# Altium PCB PCB1.PcbDoc
Units mil, origin at the board's own origin, x right, y up, seen from the top; angles counter-clockwise.
Board outline 7874.02 x 2795.28 mil, 2 copper layers (Top Layer, Bottom Layer); 61 components, 60 nets, 228 pads, 10 vias.
Unrouted connection lines stored in the file: 50.
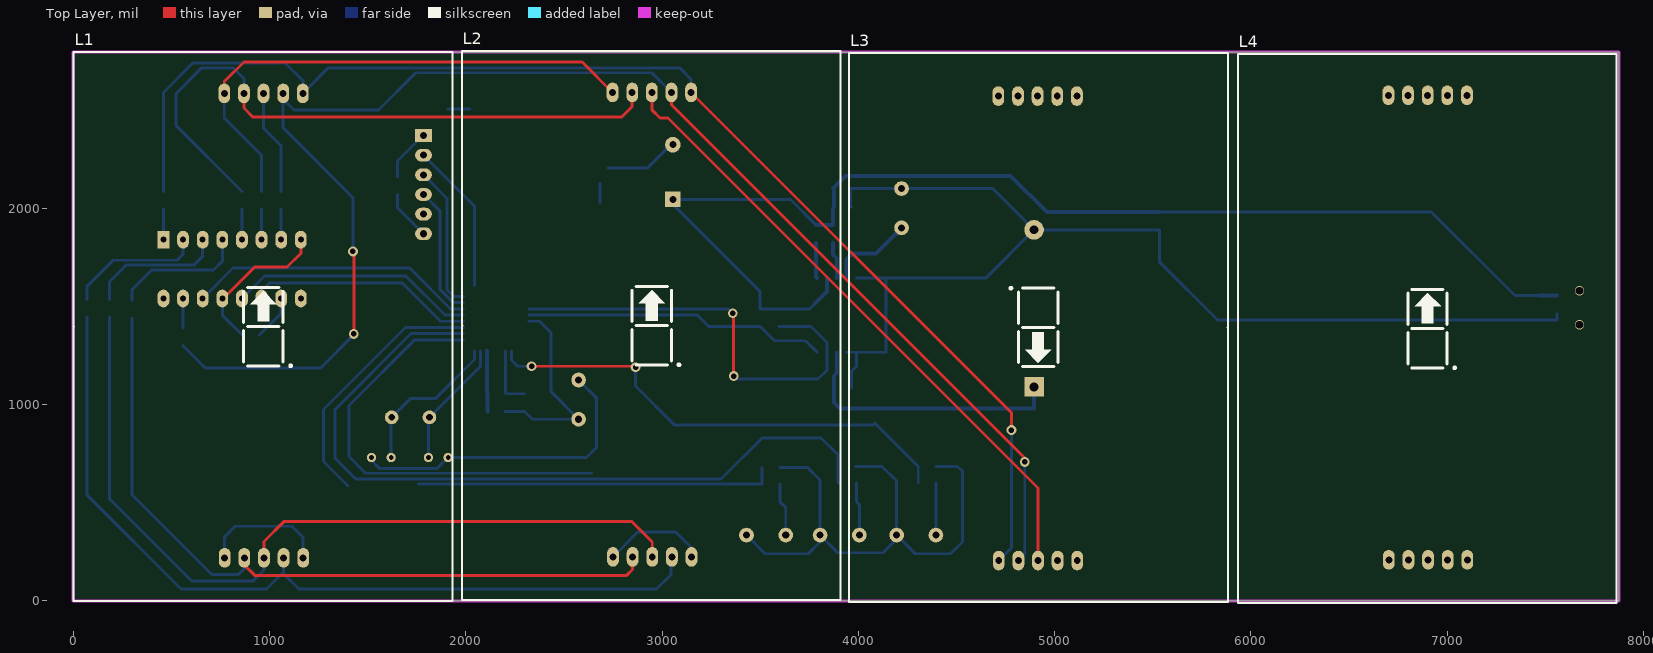
[diagram p0: Top Layer view]
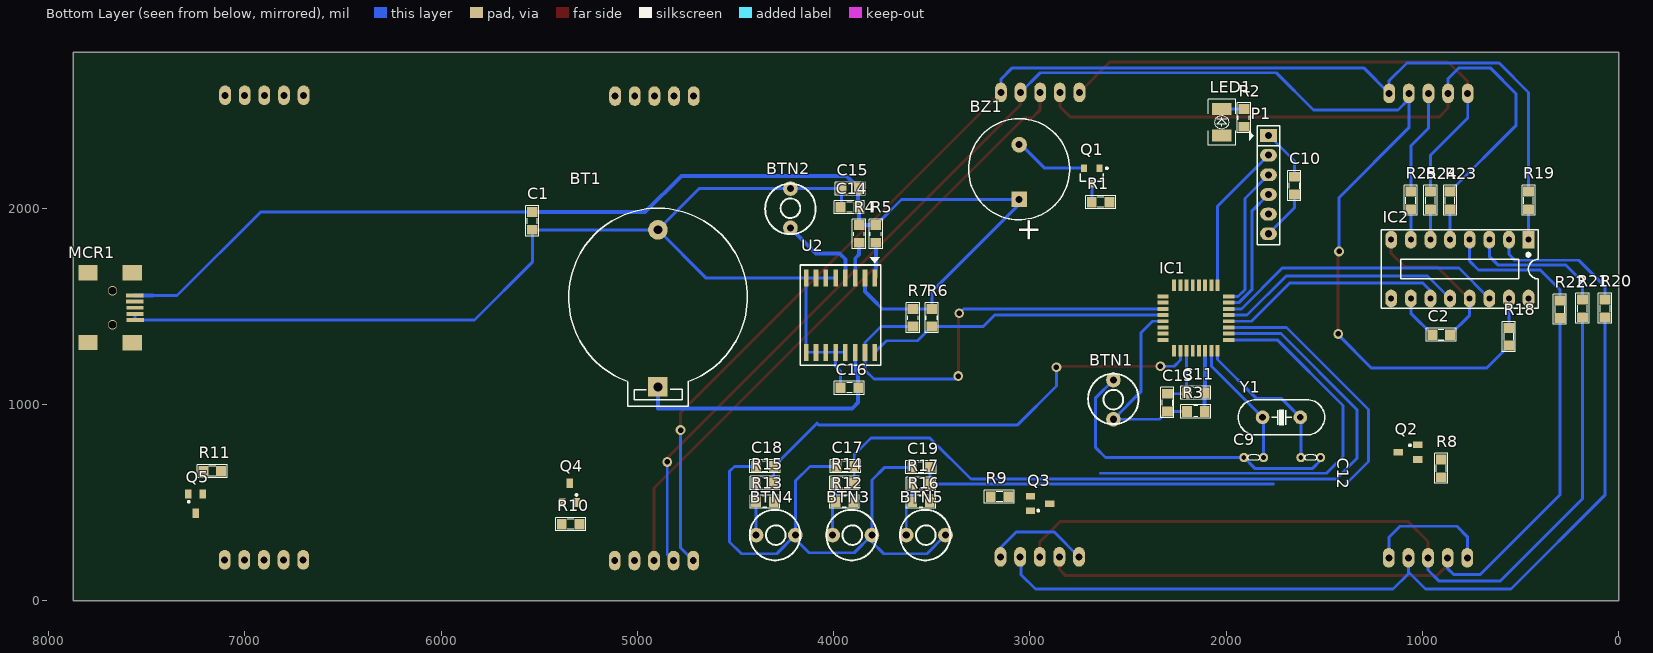
[diagram p1: Bottom Layer view, seen from below]
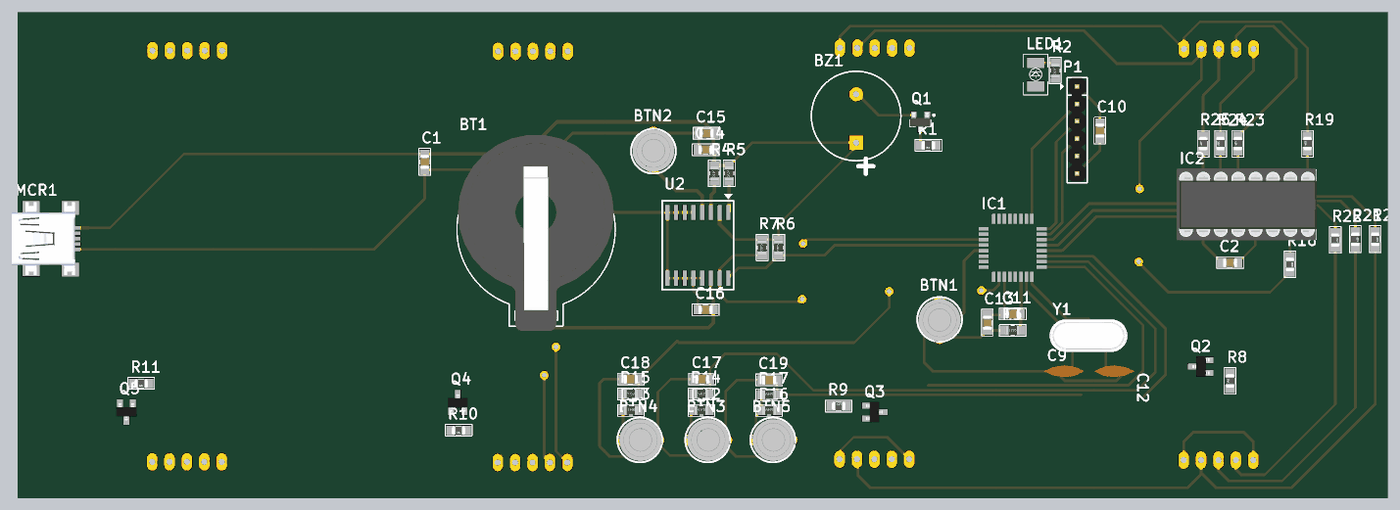
[diagram p2: 3D render of the assembled board from below, using the file's embedded part models]

## Layer stack, top to bottom
Top Solder: solder mask 0.4, Solder Resist, Dk 3.5
Top Layer: signal copper 1.4
Dielectric 1: dielectric 12.6, FR-4, Dk 4.8
Bottom Layer: signal copper 1.4
Bottom Solder: solder mask 0.4, Solder Resist, Dk 3.5

## Board outline
0,0 7874.02,0 7874.02,2795.28 0,2795.28

## Design rules (kind name [scope] priority, off if disabled: settings)
Clearance [All] p1: gap=10 ignorepadtopadclearanceinfootprint=FALSE
PolygonConnect [All] p1: connectstyle=Relief reliefconductorwidth=10 reliefentries=4 polygonreliefangle="90 Angle" airgapwidth=10
RoutingVias [All] p1: holewidth=28 width=50 viastyle="Through Hole" minholewidth=28 minwidth=50 maxholewidth=28 maxwidth=50
SolderMaskExpansion [All] p1: expansion=4
Width [All] p1: maxlimit=20 minlimit=10 preferedwidth=15
30 further rules are at their usual default settings.

## Components (designator, comment, footprint, x,y, rotation, side; value= is the part's Value field where it differs from the comment)
BT1 "PIN 3V" PIN3V 4895,1090 r90 bottom
BTN1 "Button" Button 2570,1025 r90 bottom
BTN2 "Button" Button 4225,2000 r270 bottom
BTN3 "Button" Button 3905,340 r0 bottom
BTN4 "Button" Button 4295,340 r0 bottom
BTN5 "Button" Button 3530,340 r0 bottom
BZ1 "Buzzer" BUZZER 3055,2043.73 r90 bottom
C1 "Cap-100nF-50V-0805" CAP-SM-0805 5535,1890 r90 bottom value=100nF/50V
C2 "Cap-100nF-50V-0805" CAP-SM-0805 860,1355 r0 bottom value=100nF/50V
C9 "Capacitor Ceramic" Tu-pico 1910,730 r180 bottom value=33p
C10 "Cap-100nF-50V-0805" CAP-SM-0805 1652.76,2160 r270 bottom value=100nF/50V
C11 "Cap-100nF-50V-0805" CAP-SM-0805 2200,1060 r180 bottom value=100nF/50V
C12 "Capacitor Ceramic" Tu-pico 1520,730 r0 bottom value=33p
C13 "Cap-10uF-50V-0805" CAP-SM-0805 2300,1055 r270 bottom value=10uF/50V
C14 "Cap-100pF-50V-0805" CAP-SM-0805 3965,2005 r180 bottom value=100pF/50V
C15 "Cap-10uF-50V-0805" CAP-SM-0805 3960,2100 r180 bottom value=100nF/50V
C16 "Cap-10uF-50V-0805" CAP-SM-0805 3965,1085 r180 bottom value=100nF/50V
C17 "Cap-10uF-50V-0805" CAP-SM-0805 3895,685 r0 bottom value=1uF/50V
C18 "Cap-10uF-50V-0805" CAP-SM-0805 4305,685 r0 bottom value=1uF/50V
C19 "Cap-10uF-50V-0805" CAP-SM-0805 3510,680 r0 bottom value=1uF/50V
IC1 "ATmega8" 32A_ATM 2155,1440 r90 bottom value=ATmega8-L
IC2 "74HC595" DIP16/W0.3 460,1840 r0 bottom
L1 "7SEG_BIG" "7SEGS_BIG 48 x 70" 3,0 r0 top
L2 "7SEG_BIG" "7SEGS_BIG 48 x 70" 1981,5 r0 top
L3 "7SEG_BIG" "7SEGS_BIG 48 x 70" 5882,2790 r180 top
L4 "7SEG_BIG" "7SEGS_BIG 48 x 70" 5933,-10 r0 top
LED1 "LED" "LED 3512" 2022.76,2370.2 r90 bottom value="LED 3 - 5 ly 2 Colour"
MCR1 "MICRO_USB_MINI" USB-B-Mini 7572,1493 r90 bottom
P1 "Header 6" JP6 1785,2370 r270 bottom
Q1 "Transistor C1815" "SOT23-3 Leads" 2685,2164.37 r270 bottom
Q2 "A1015" SOT23B 1074.21,757.4 r90 bottom
Q3 "A1015" SOT23B 2948,495 r270 bottom
Q4 "A1015" SOT23B 5345,550 r180 bottom
Q5 "A1015" SOT23B 7250,495 r0 bottom
R1 "Resistor 1/4W" RES-SM-0805 2595,2030 r0 bottom value=15K
R2 "Res-1K-0805" RES-SM-0805 1910,2415 r90 bottom value=1K
R3 "Res-10k-0805" RES-SM-0805 2200,965 r180 bottom value=10K
R4 "Res-10k-0805" RES-SM-0805 3870,1823.73 r90 bottom value=4.7K
R5 "Res-10k-0805" RES-SM-0805 3785,1823.73 r90 bottom value=4.7K
R6 "Res-10k-0805" RES-SM-0805 3500,1397.24 r90 bottom value=4.7K
R7 "Res-10k-0805" RES-SM-0805 3595,1397.24 r90 bottom value=4.7K
R8 "Resistor 1/4W" RES-SM-0805 905,630 r90 bottom value=1K
R9 "Resistor 1/4W" RES-SM-0805 3200,530 r180 bottom value=1K
R10 "Resistor 1/4W" RES-SM-0805 5295,390 r0 bottom value=1K
R11 "Resistor 1/4W" RES-SM-0805 7120,660 r0 bottom value=1K
R12 "Res-1K-0805" RES-SM-0805 3990,505 r180 bottom value=10K
R13 "Res-1K-0805" RES-SM-0805 4395,505 r180 bottom value=10K
R14 "Res-1K-0805" RES-SM-0805 3990,600 r180 bottom value=1K
R15 "Res-1K-0805" RES-SM-0805 4395,600 r180 bottom value=1K
R16 "Res-1K-0805" RES-SM-0805 3600,505 r180 bottom value=10K
R17 "Res-1K-0805" RES-SM-0805 3600,595 r180 bottom value=1K
R18 "Resistor 1/4W" RES-SM-0805 560,1390 r270 bottom value=330
R19 "Resistor 1/4W" RES-SM-0805 460,1995 r90 bottom value=330
R20 "Resistor 1/4W" RES-SM-0805 70,1535 r270 bottom value=330
R21 "Resistor 1/4W" RES-SM-0805 185,1535 r270 bottom value=330
R22 "Resistor 1/4W" RES-SM-0805 300,1530 r270 bottom value=330
R23 "Resistor 1/4W" RES-SM-0805 860,1995 r90 bottom value=330
R24 "Resistor 1/4W" RES-SM-0805 960,1995 r90 bottom value=330
R25 "Resistor 1/4W" RES-SM-0805 1060,1995 r90 bottom value=330
U2 "DS3231" SL3016 3965,1455 r270 bottom
Y1 "8Mhz" XTAL 1718.94,935 r0 bottom

## Footprints (in the part's own frame and the unit in brackets; to place one, negate y for a bottom-side part, rotate by r counter-clockwise, add the part's x,y. Pads: shape width x height; smd on the part's side, far side on the other; paste and mask are expansions set on the pad)
"7SEGS_BIG 48 x 70" [mil] "7SEGS_BIG 48 x 70"
  oval 60x100 hole 35.43: 1(769,219) 2(869,219) 3(969,219) 4(1069,219) 5(1169,219) 6(1167,2585) 7(1067,2585) 8(967,2585) 9(867,2585) 10(767,2585)
  silkscreen extent 0,-1 1929,2795, body extent 0,0 1929,2795, height 473
32A_ATM [mil]
  rect 58x20 smd paste+0 mask+0: 1(-167,110.24) 2(-167,78.74) 3(-167,47.24) 4(-167,15.75) 5(-167,-15.75) 6(-167,-47.24) 7(-167,-78.74) 8(-167,-110.24) 17(167,-110.24) 18(167,-78.74) 19(167,-47.24) 20(167,-15.75) 21(167,15.75) 22(167,47.24) 23(167,78.74) 24(167,110.24)
  rect 20x58 smd paste+0 mask+0: 9(-110.24,-167) 10(-78.74,-167) 11(-47.24,-167) 12(-15.75,-167) 13(15.75,-167) 14(47.24,-167) 15(78.74,-167) 16(110.24,-167) 25(110.24,167) 26(78.74,167) 27(47.24,167) 28(15.75,167) 29(-15.75,167) 30(-47.24,167) 31(-78.74,167) 32(-110.24,167)
  body extent 0,0 10,10, height 10
Button [mil] "Button"
  round 75 hole 36: 1(-100,5) 2(100,5)
  silkscreen extent -125,-124 132,134, body extent -127,-117 127,127, height 169
BUZZER [mil] "Buzzer"
  rect 80x80 hole 36: 1(1.27,0)
  round 80 hole 36: 2(280,0)
  silkscreen extent -102,-257 412,257
CAP-SM-0805 [mil]
  rect 50x55 smd: 1(0,0) 2(90,0)
  silkscreen extent -32,-34 122,33, body extent 4,-27 86,27, height 30
DIP16/W0.3 [mil] "16 PIN, W 300mil, Pin to pin 100mil"
  rect 60x90 hole 31: 1(0,0)
  oval 60x90 hole 31: 2(100,0) 3(200,0) 4(300,0) 5(400,0) 6(500,0) 7(600,0) 8(700,0) 9(700,300) 10(600,300) 11(500,300) 12(400,300) 13(300,300) 14(200,300) 15(100,300) 16(0,300)
  silkscreen extent -50,-50 750,350, body extent -52,-57 752,356, height 299
JP6 [mil] "JP6"
  rect 65x85 hole 36: 1(0,0)
  oval 65x85 hole 36: 2(100,0) 3(200,0) 4(300,0) 5(400,0) 6(500,0)
  silkscreen extent -50,-99 556,58, body extent -48,-50 548,48, height 323
"LED 3512" [mil]
  rect 60x100 smd: 1(-0.2,0) 2(134.8,0)
  silkscreen extent -50,-70 185,70, body extent -20,-60 155,60, height 75
PIN3V [mil] "Socket PIN 3V"
  rect 100x100 hole 45: 1(0,0)
  round 100 hole 45: 2(800,0)
  silkscreen extent -100,-455 910,455, body extent -128,-447 1002,449, height 278
RES-SM-0805 [mil]
  rect 50x55 smd: 1(0,0) 2(90,0)
  silkscreen extent -32,-34 121,33, body extent 6,-25 84,25, height 31
SL3016 [mm]
  rect 2.2x0.6 smd: 1(-4.795,4.445) 2(-4.795,3.175) 3(-4.795,1.905) 4(-4.795,0.635) 5(-4.795,-0.635) 6(-4.795,-1.905) 7(-4.795,-3.175) 8(-4.795,-4.445) 9(4.795,-4.445) 10(4.795,-3.175) 11(4.795,-1.905) 12(4.795,-0.635) 13(4.795,0.635) 14(4.795,1.905) 15(4.795,3.175) 16(4.795,4.445)
  silkscreen extent -7.49,-5.21 6.48,5.21, body extent -5.33,-5.15 5.33,5.15, height 2.65
"SOT23-3 Leads" [mm] "SOT23, 3-Leads, Body 2.92x2.37mm, Pitch 1.00mm, IPC Medium Density"
  rect 1x0.8 smd: 1(-1,1) 2(-1,-1) 3(1,0)
  silkscreen extent -1.12,-1.5 0.7,2.07, body extent -1.32,-1.52 1.32,1.52, height 1.11
SOT23B [mm] "SOT 23B"
  rect 0.85x1.2 smd: 1(0.94,-1.245) 2(0,1.25) 3(-0.95,-1.25)
  silkscreen extent 0.77,-0.38 1.02,-0.13, body extent -1.5,-1.3 1.5,1.2, height 1.06
Tu-pico [mm] "Tu gom mini"
  round 1.2 hole 0.6: 1(0,0) 2(2.54,0)
  silkscreen extent 0.51,-0.38 2.03,0.38, body extent -1.65,-0.85 4.19,0.85, height 6.12
USB-B-Mini [mm]
  rect 2x2.5 smd: 0(-4.5,0) 0(-4.496,5.74) 0(4.5,0) 0(4.504,5.74)
  rect 0.5x2.25 smd: 1(1.575,-0.305) 2(0.787,-0.318) 3(0,-0.33) 4(-0.787,-0.343) 5(-1.575,-0.356)
  body extent -5.35,-0.67 5.35,8.53, height 3.95
XTAL [mil] "Footpin for Crystal 2 pin"
  round 70 hole 34: 1(-96.06,0) 2(96.06,0)
  silkscreen extent -220,-90 220,90, body extent -216,-88 216,88, height 142

## Part data
BT1: "Battery 3VDC"
C1 C2 C10 C11: "CAP CER 0.1UF 50V Y5V 0805", Manufacturer="Samsung Electro-Mechanics", Manufacturer Part Number=CL21F104ZBCNNNC, Supplier 1 Part Number=1276-1007-1-ND, Local Supplier=thegioiic, Local Supplier Link=https://thegioiic.com/products/tu-100nf-0-1uf-50v-0805, Supplier 1=Digikey, Supplier 1 Link=https://www.digikey.com/product-detail/en/samsung-electro-mechanics/CL21F104ZBCNNNC/1276-1007-1-ND/3889093
C9 C12: library part CapCeramic, "Capacitor", LatestRevisionDate=17-Jul-2002, LatestRevisionNote="Re-released for DXP Platform.", PackageReference=RAD-0.3, Published=8-Jun-2000, Publisher="Altium Limited"
C13 C15 C16 C17 C18 C19: "CAP CER 10UF 50V X5R 0805", Manufacturer=Yageo, Manufacturer Part Number=CC0805KKX5R9BB106, Supplier 1 Part Number=311-3499-2-ND, Local Supplier=thegioiic, Local Supplier Link=https://thegioiic.com/products/tu-10uf-50v-0805, Supplier 1=Digikey, Supplier 1 Link=https://www.digikey.com/product-detail/en/yageo/CC0805KKX5R9BB106/311-3499-2-ND/7164383
C14: "CAP CER 100PF 50V C0G/NP0 0805", Manufacturer=KEMET, Manufacturer Part Number=C0805C101J5GACTU, Supplier 1 Part Number=399-1122-1-ND, Local Supplier=thegioiic, Local Supplier Link=https://thegioiic.com/products/tu-100pf-50v-0805, Supplier 1=Digikey, Supplier 1 Link=https://www.digikey.com/product-detail/en/kemet/C0805C101J5GACTU/399-1122-1-ND/411397
IC1: library part ATmega8A-AU, "8-Bit AVR Microcontroller with 8K Bytes of In-System Programmable Flash Memory"
IC2: library part 74595, "8 Bit Serial input - Parallel Output"
LED1: library part "LED SMD"
P1: "Header, 6-Pin", LatestRevisionDate=17-Jul-2002, LatestRevisionNote="Re-released for DXP Platform.", Publisher="Altium Limited"
Q1: library part C1815
Q2 Q3 Q4 Q5: "PNP 600mW, ECB", =A1013
R1 R8 R9 R10 R11 R18 R19 R20 R21 R22 R23 R24 R25: library part RES
R2 R12 R13 R14 R15 R16 R17: "RES 1K OHM 1% 1/4W 0805", Manufacturer="Stackpole Electronics Inc", Manufacturer Part Number=RNCP0805FTD1K00, Supplier 1 Part Number=RNCP0805FTD1K00CT-ND, Local Supplier=thegioiic, Local Supplier Link=https://thegioiic.com/products/dien-tro-1k-ohm-0805-5, Supplier 1=Digikey, Supplier 1 Link=https://www.digikey.com/product-detail/en/stackpole-electronics-inc/RNCP0805FTD1K00/RNCP0805FTD1K00CT-ND/2240568
R3 R4 R5 R6 R7: "RES 10K OHM 1% 1/4W 0805", Manufacturer="Stackpole Electronics Inc", Manufacturer Part Number=RNCP0805FTD10K0, Supplier 1 Part Number=RNCP0805FTD10K0CT-ND, Local Supplier=thegioiic, Local Supplier Link=https://thegioiic.com/products/dien-tro-10k-ohm-0805-5, Supplier 1=Digikey, Supplier 1 Link=https://www.digikey.com/product-detail/en/stackpole-electronics-inc/RNCP0805FTD10K0/RNCP0805FTD10K0CT-ND/2240601
Y1: library part XTAL, "Crystal Oscillator", LatestRevisionDate=17-Jul-2002, LatestRevisionNote="Re-released for DXP Platform.", PackageReference=R38, Published=8-Jun-2000, Publisher="Altium Limited"

## Via types
v1: diameter 50, hole 28, Top Layer to Bottom Layer, 8 vias
v2: diameter 47.24, hole 39.37, Top Layer to Bottom Layer, 2 vias

## Nets (pads, with @x,y where several pads share a name; then routed paths per layer and width w, separated by ;. In a path a pad name is that pad's centre, name@x,y a point inside that pad or via, vN(x,y) a via of type N, cw(c..) or ccw(c..) an arc to the next point about the centre after c; other vN are vias at no path point)
5V: BZ1.1 C1.2 C2.2 C10.1 C11.2 C14.2 C15.2 IC1.6 IC2.10 IC2.16 LED1.1 MCR1.1 P1.1 Q2.1 Q3.1 Q4.1 Q5.1 R3.2 R4.2 R5.2 R6.2 R7.2 R12.2 R13.2 R16.2 U2.2 | length 7012.9
  Bottom Layer w15: C2.2 1060,1465 IC2.10 ; C10.1 1652.76,2240 P1.1@1777.76,2365 ; 3780,1515 3752.24,1487.24 R7.2 R6.2 3500,1575 3055,2020 BZ1.1 3653.73,2045 R5.2 ; C1.2 6920,1980 7345,1555 7470,1555
  Bottom Layer w20: IC1.6 2107.76,1062.24 C11.2 R3.2 ; 3780,1515 3840,1575 U2.2 ; R5.2 R4.2 3870,2000 C14.2 3875,2095 C15.2 3935,2165 4775,2165 4960,1980 C1.2 ; 7470,1555 MCR1.1
BTN1: C18.1 IC1.2 R15.2 | length 2491.1
  Top Layer w15: v1(2335,1195) 2860,1195 v1(2865,1190)
  Bottom Layer w15: IC1.2 2233.74,1226.26 2265,1195 v1(2335,1195) ; v1(2865,1190) 2865,1095 3065,895 4075,895 4085,905 C18.1 R15.2
BTN2: C17.1 IC1.10 R14.2 | length 3935.8
  Bottom Layer w15: IC1.10 1721.26,1361.26 1335,975 1335,725 1440,620 3300,620 3510,830 3810,830 3895,745 C17.1 3895,605 R14.2
BTN3: C19.1 IC1.11 R17.2 | length 3163
  Bottom Layer w15: 1399.64,585 1275,709.64 1275,975 1692.76,1392.76 IC1.11 ; 1759.64,595 R17.2 C19.1
Buzzer: IC1.9 R1.1 | length 2251.9
  Bottom Layer w15: IC1.9 1739.76,1329.76 1405,995 1405,735 1490,650 2640,650
CLK: IC1.32
CS: IC1.31
DIG0: IC1.23 R9.1
DIG1: IC1.24 R8.1
DIG2: IC1.25 R11.1
DIG3: IC1.26 R10.1
DIN: IC1.30
DS: IC1.14 IC2.14 | length 1478.3
  Bottom Layer w15: IC2.14 815,1695 1715,1695 1922.76,1487.24 IC1.14
GND: BT1.2 BTN1.2 BTN2.1 BTN3.1 BTN4.1 BTN5.1 C1.1 C2.1 C9.1 C10.2 C11.1 C12.1 C13.1 C14.1 C15.1 C16.1 C17.2 C18.2 C19.2 IC1.3 IC2.8 IC2.13 MCR1.4 MCR1.5 P1.6 Q1.1 R2.1 U2.5 U2.6 U2.7 U2.8 U2.9 U2.10 U2.11 U2.12 U2.13 | length 11722.1
  Top Layer w15: IC2.13 765,1540 925,1700 1090,1700 1160,1770 IC2.8
  Bottom Layer w15: IC2.13 760,1455 C2.1 ; C12.1 1520,715 1560,675 1855,675 C9.1 2615,730 2665,780 2665,1035 BTN1.2 ; C10.2 1652.76,2002.24 P1.6 ; IC1.3 2202.24,1057.76 2205,1055 C13.1 ; BTN5.1 3525,240 3745,240 3805,300 BTN3.1 ; C19.2 3740,680 3805,615 BTN3.1 ; U2.13 U2.12 ; C16.1 3965,1170 3990,1195 U2.12 ; C14.1 3960,2010 C15.1 BTN2.1 4685,2100 BT1.2 ; C17.2 4120,685 4195,610 BTN4.1 ; U2.5 U2.6 U2.7 U2.8 ; C18.2 4505,685 4530,660 4530,300 4470,240 4290,240 BTN4.1 ; MCR1.4 7558,1461.5 MCR1.5 5829,1431 5535,1725 C1.1 BT1.2 ; BTN3.1 3895,245 4125,245 4195,315 BTN4.1 ; U2.12 U2.11 U2.10 U2.9 U2.8 ; U2.8 4648.78,1643.78 BT1.2
MISO: IC1.16 P1.3 | length 732.1
  Bottom Layer w15: P1.3 1905,2050 1905,1585 1939.76,1550.24 IC1.16
MOSI: IC1.15 P1.4 | length 665.9
  Bottom Layer w15: P1.4 1870,1985 1870,1584.64 1935.9,1518.74 IC1.15
NetBT1_1: BT1.1 C16.2 U2.14 | length 1404.9
  Bottom Layer w20: U2.14 3890,1160 3875,1145 C16.2 3875,1010 3905,980 4895,980 BT1.1
NetBTN2_2: BTN2.2 U2.4 | length 442.5
  Bottom Layer w20: U2.4 3940,1740 3970,1770 4090,1770 BTN2.2
NetBTN3_2: BTN3.2 R12.1 R14.1 | length 271.2
  Bottom Layer w15: R14.1 R12.1 4005,490 BTN3.2
NetBTN4_2: BTN4.2 R13.1 R15.1 | length 265
  Bottom Layer w15: BTN4.2 R13.1 R15.1
NetBTN5_2: BTN5.2 R16.1 R17.1 | length 272.4
  Bottom Layer w15: R17.1 R16.1 3630,475 BTN5.2
NetBZ1_2: BZ1.2 Q1.2 | length 384.5
  Bottom Layer w15: Q1.2 2925.01,2203.74 BZ1.2@3055,2333.73
NetC9_2: C9.2 IC1.7 Y1.2 | length 653.3
  Bottom Layer w15: C9.2 1810,930 Y1.2 2076.26,1196.26 IC1.7
NetC12_2: C12.2 IC1.8 Y1.1 | length 793.4
  Bottom Layer w15: C12.2 1620,932.13 Y1.1 1717.87,1030 1845,1030 2044.76,1229.76 IC1.8
NetIC2_1: IC2.1 R19.1 | length 155
  Bottom Layer w15: IC2.1 R19.1
NetIC2_2: IC2.2 R20.1 | length 698.3
  Bottom Layer w15: R20.1 70,1600 205,1735 530,1735 560,1765 IC2.2
NetIC2_3: IC2.3 R21.1 | length 703.8
  Bottom Layer w15: R21.1 185,1625 270,1710 615,1710 660,1755 IC2.3
NetIC2_4: IC2.4 R22.1 | length 685.1
  Bottom Layer w15: R22.1 300,1585 400,1685 715,1685 760,1730 IC2.4
NetIC2_5: IC2.5 R23.1 | length 155
  Bottom Layer w15: IC2.5 R23.1
NetIC2_6: IC2.6 R24.1 | length 155
  Bottom Layer w15: IC2.6 R24.1
NetIC2_7: IC2.7 R25.1 | length 155
  Bottom Layer w15: IC2.7 R25.1
NetIC2_15: IC2.15 R18.1 | length 150
  Bottom Layer w15: R18.1 IC2.15
NetL1_1: L1.1 L1.5 Q2.2 | length 657.6
  Bottom Layer w15: L1.1 772,327 825,380 1115,380 1172,323 L1.5
NetL1_2: L1.2 L2.2 L3.2 L4.2 R22.2 | length 3819.1
  Top Layer w15: L1.2 872,183 925,130 2820,130 2850,160 L2.2
  Bottom Layer w15: R22.2 300,540 705,135 843,135 872,164 L1.2
NetL1_3: L1.3 L2.3 L3.3 L4.3 R21.2 | length 4194.7
  Top Layer w15: L1.3 972,302 1075,405 2845,405 2950,300 L2.3
  Bottom Layer w15: R21.2 185,520 605,100 915,100 972,157 L1.3
NetL1_4: L1.4 L2.4 L3.4 L4.4 R20.2 | length 4351.5
  Bottom Layer w15: R20.2 70,540 550,60 985,60 1072,147 ; L1.4 1072,147 ; L2.4 3045,219 3045,133 2972,60 1150,60 1072,138 1072,147
NetL1_6: L1.6 L2.6 L3.6 L4.6 R19.2 | length 6590.2
  Top Layer w15: L2.6 4780,958 v1(4780,870)
  Bottom Layer w15: R19.2 460,2590 610,2740 1080,2740 1170,2650 L1.6 1300,2715 3090,2715 3148,2657 L2.6 ; L3.6 4780,270 v1(4780,870)
NetL1_7: L1.7 L2.7 L3.7 L4.7 R18.2 | length 7632
  Top Layer w15: v1(1425,1780) 1430,1775 v1(1430,1360) ; L2.7 3048,2527 4847.66,727.34 v1(4847.66,707.66)
  Bottom Layer w15: R18.2 675,1185 1260,1185 1430,1355 v1(1430,1360) ; L1.7 L1.7@1070,2555 ; v1(1425,1780) 1425,2055 1070,2410 L1.7@1070,2555 ; L2.7 2948,2690 1745,2690 1555,2500 1125,2500 L1.7@1070,2555 ; L3.7 4847.66,237.66 v1(4847.66,707.66)
NetL1_8: L1.8 L2.8 L3.8 L4.8 R25.2 | length 3760.5
  Top Layer w15: L2.8 2948,2502 2990,2460 3030,2460 4915,575 L3.8
  Bottom Layer w15: L1.8 970,2407 1060,2317 R25.2
NetL1_9: L1.9 L2.9 L3.9 L4.9 R23.2 | length 3301
  Top Layer w15: L1.9 870,2510 915,2465 2795,2465 2848,2518 L2.9
  Bottom Layer w15: R23.2 525,2420 525,2585 655,2715 815,2715 870,2660 L1.9
NetL1_10: L1.10 L2.10 L3.10 L4.10 R24.2 | length 2722.3
  Top Layer w15: L1.10 770,2645 870,2745 2593,2745 L2.10
  Bottom Layer w15: L1.10 770,2460 960,2270 R24.2
NetL2_1: L2.1 L2.5 Q3.2 | length 531.3
  Bottom Layer w15: L2.1 2876,350 3070,350 3150,270 L2.5
NetL3_1: L3.1 L3.5 Q4.2
NetL4_1: L4.1 L4.5 Q5.2
NetLED1_2: LED1.2 R2.2 | length 112.8
  Bottom Layer w15: R2.2 LED1.2
NetQ1_3: Q1.3 R1.2 | length 95
  Bottom Layer w15: R1.2 Q1.3
NetQ2_3: Q2.3 R8.2
NetQ3_3: Q3.3 R9.2
NetQ4_3: Q4.3 R10.2
NetQ5_3: Q5.3 R11.2
NetR4_1: R4.1 U2.3 | length 188.2
  Bottom Layer w20: R4.1 3870,1765 3890,1745 U2.3
NetR5_1: R5.1 U2.1 | length 182
  Bottom Layer w20: R5.1 3785,1648.78 U2.1
RST: BTN1.1 C13.2 IC1.29 P1.5 R3.1 | length 1027.1
  Bottom Layer w15: R3.1 C13.2 2340,925 BTN1.1 2435,1065 2435,1365 2375.75,1424.25 IC1.29
SCK: IC1.17 P1.2 | length 770.6
  Bottom Layer w15: P1.2 2044.76,2010.24 IC1.17
SCL: IC1.28 R6.1 U2.16 | length 1546.5
  Bottom Layer w15: IC1.28 3179.25,1455.75 3237.76,1397.24 R6.1 3572.24,1325 3731.22,1325 U2.16
SDA: IC1.27 R7.1 U2.15 | length 2288.8
  Top Layer w15: v1(3360,1465) 3365,1460 v1(3365,1145)
  Bottom Layer w15: IC1.27 3337.76,1487.24 v1(3360,1465) ; v1(3365,1145) 3380,1130 3795,1130 3840,1175 U2.15 3840,1316 3758.76,1397.24 R7.1
SH_CP: IC1.12 IC2.11 | length 1165.7
  Bottom Layer w15: IC2.11 960,1580 1000,1620 1675,1620 1870.75,1424.25 IC1.12
SQH: IC2.9
ST_CP: IC1.13 IC2.12 | length 1258.2
  Bottom Layer w15: IC2.12 975,1655 1695,1655 1894.25,1455.75 IC1.13
VCC: 
pads on no net: IC1.1 IC1.4 IC1.5 IC1.18 IC1.19 IC1.20 IC1.21 IC1.22 MCR1.0 MCR1.2 MCR1.3
copper on no net:
  other v2: 7673.57,1406.39 7673.57,1579.61

## Keep-outs
Top Layer:
  the board outline again, w15

## Text inside footprints (layer, text, board x,y; h text height)
BZ1: Bottom Overlay "+" at 2955,1823.73 h112.5 r270